# EAGLE board shrinking (EAGLE 7.5.0)
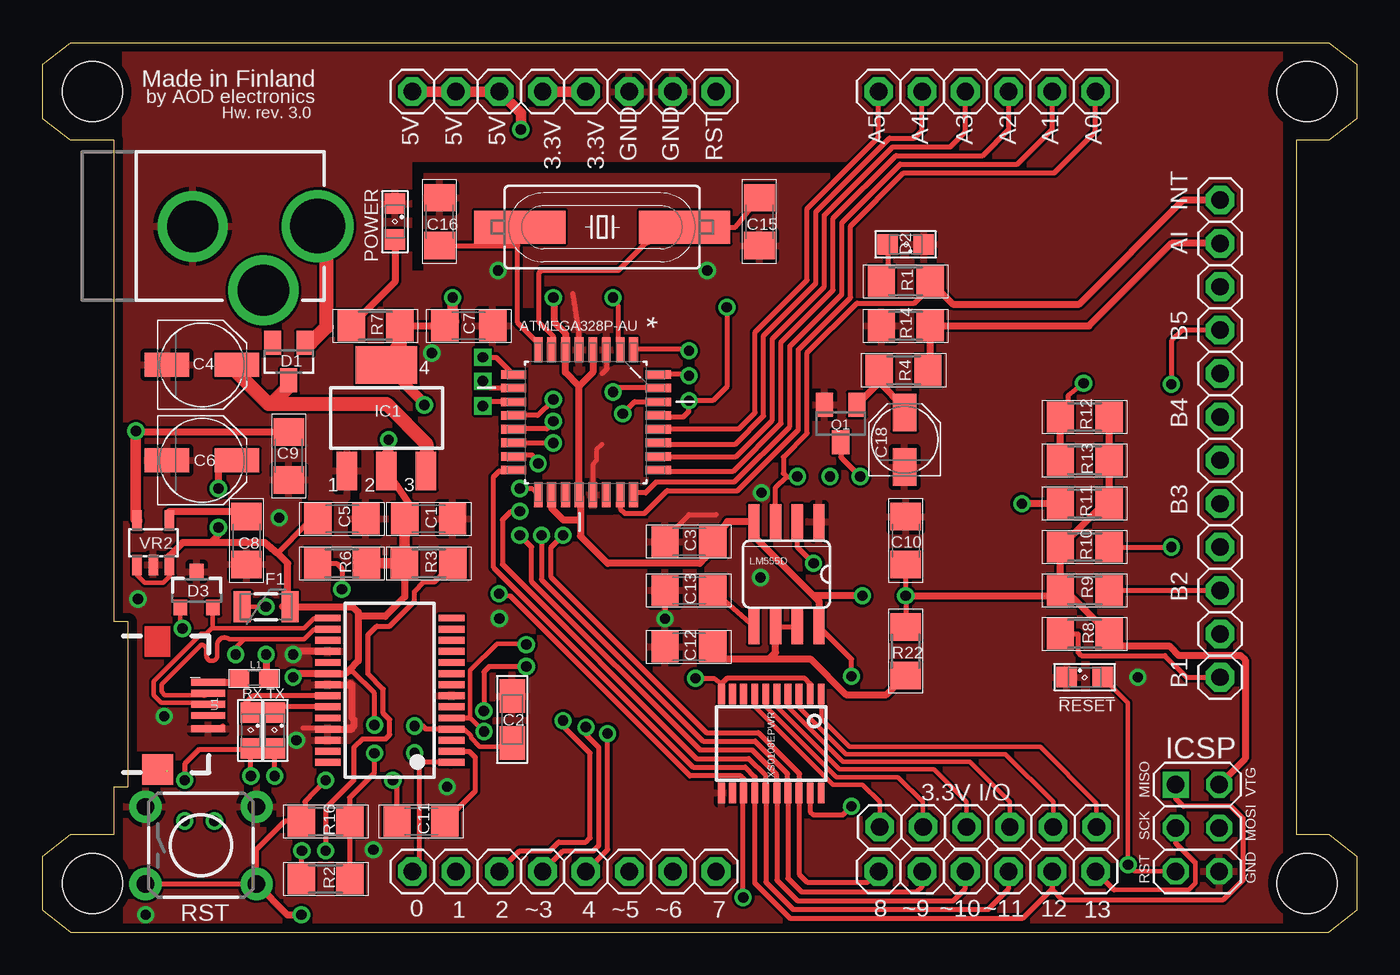
[diagram p0: board, top side]
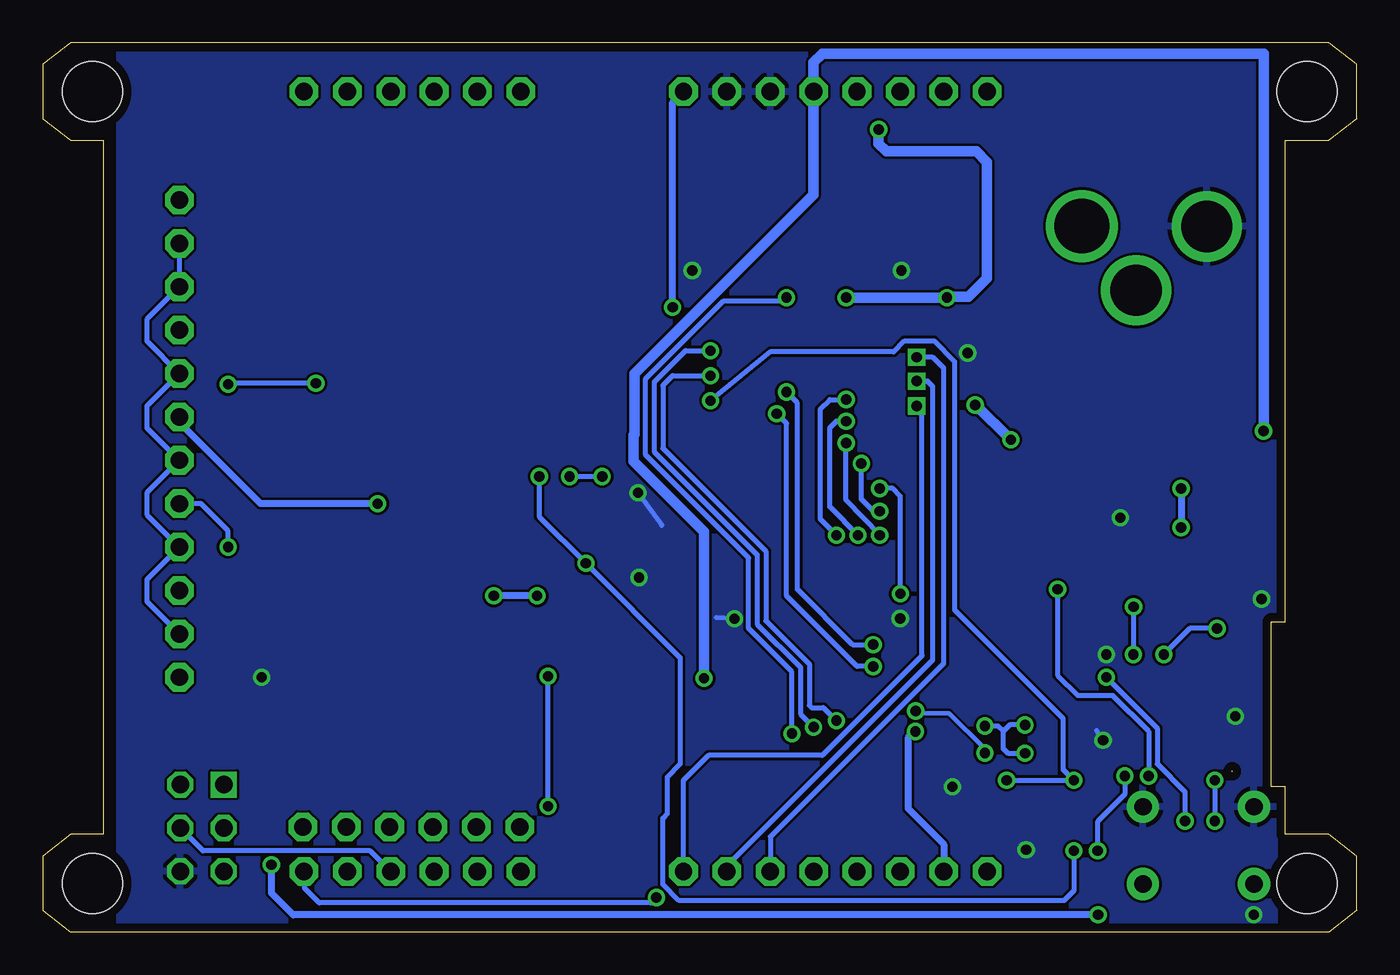
[diagram p1: board, bottom side, seen from below]

Size 76.96 x 52.07 mm. Coordinates in mm from the lower left corner, seen from the top.
Outline: 7.3,9.4 7.3,9.46
Outline: 1.65,0 75.31,0 76.96,1.27 76.96,4.45 75.31,5.71 73.41,5.71 73.41,46.35 75.31,46.35 76.96,47.62 76.96,50.8 75.31,52.07 1.65,52.07 0,50.8 0,47.62 1.65,46.35 4.19,46.35 4.19,18.16 5.02,18.16 5.02,8.51 4.19,8.51 4.19,5.71 1.65,5.71 0,4.45 0,1.27 1.65,0
Copper layers (1*16): Top 0.035mm / dielectric 1.5mm / Bottom 0.035mm
Design rules "default *": minimum track width 10mil, minimum drill 24mil, track to track 6mil, track to pad 6mil, pad to pad 6mil, via to via 6mil, smd to smd 6mil, copper to edge 20mil, drill to drill 8mil, minimum pad ring 10mil, minimum via ring 8mil, stop-mask expansion 4mil, vias tented up to drill 0mil, thermal gap 10mil
Holes 3.5 mm at 74.04,49.21 74.04,2.86 2.92,49.21 2.92,2.86

## Footprints (pad centres in the part's own frame; a part is rotated, then mirrored left to right if it is on the bottom)
1X06 = drill 1.016 pad 1.676 octagon: 1 -6.35,0; 2 -3.81,0; 3 -1.27,0; 4 1.27,0; 5 3.81,0; 6 6.35,0
1X12 = drill 1.016 pad 1.676 octagon: 1 -13.97,0; 2 -11.43,0; 3 -8.89,0; 4 -6.35,0; 5 -3.81,0; 6 -1.27,0; 7 1.27,0; 8 3.81,0; 9 6.35,0; 10 8.89,0; 11 11.43,0; 12 13.97,0
C1206 = smd 1.6 x 1.8: 1 -1.4,0; 2 1.4,0
A/3216-18R = smd 1.95 x 1.5: + 1.375,0; - -1.375,0
PANASONIC_C = smd 2.6 x 1.4: + 2.05,0; - -2.05,0
PANASONIC_B = smd 2.2 x 1.4: + 1.6,0; - -1.6,0
1X08 = drill 1.016 pad 1.676 octagon: 1 -8.89,0; 2 -6.35,0; 3 -3.81,0; 4 -1.27,0; 5 1.27,0; 6 3.81,0; 7 6.35,0; 8 8.89,0
SOT23 = smd 1 x 1.4: 1 -0.95,-1.1; 2 0.95,-1.1; 3 0,1.1
SML0805 = smd 1.2 x 1.2: A 1.05,0; C -1.05,0
SOT23-3 = smd 0.8 x 0.9: 1 -0.95,-1; 2 0.95,-1; 3 0,1.1
PTC-1206 = smd 1 x 1.8: 1 -1.4,0; 2 1.4,0
SOT223 = smd 1.219 x 2.235: 1 -2.311,-3.099; 2 0,-3.099; 3 2.311,-3.099 | smd 3.6 x 2.2: 4 0,3.099
SSOP28 = smd 0.4 x 1.5: 1 -4.225,-3.625; 2 -3.575,-3.625; 3 -2.925,-3.625; 4 -2.275,-3.625; 5 -1.625,-3.625; 6 -0.975,-3.625; 7 -0.325,-3.625; 8 0.325,-3.625; 9 0.975,-3.625; 10 1.625,-3.625; 11 2.275,-3.625; 12 2.925,-3.625; 13 3.575,-3.625; 14 4.225,-3.625; 15 4.225,3.625; 16 3.575,3.625; 17 2.925,3.625; 18 2.275,3.625; 19 1.625,3.625; 20 0.975,3.625; 21 0.325,3.625; 22 -0.325,3.625; 23 -0.975,3.625; 24 -1.625,3.625; 25 -2.275,3.625; 26 -2.925,3.625; 27 -3.575,3.625; 28 -4.225,3.625
SO08 = smd 0.66 x 2.032: 1 -1.905,-3.073; 2 -0.635,-3.073; 3 0.635,-3.073; 4 1.905,-3.073; 5 1.905,3.073; 6 0.635,3.073; 7 -0.635,3.073; 8 -1.905,3.073
2X03 = drill 1.016 square: 1 -2.54,-1.27 | drill 1.016 octagon: 2 -2.54,1.27; 3 0,-1.27; 4 0,1.27; 5 2.54,-1.27; 6 2.54,1.27
POWER_JACK_PTH_LOCK = drill 2.997 pad 4.115: GND 0.025,6.557; GNDBREAK 3.762,10.7 | drill 3.2 pad 4.115: PWR 0,13.878
0603 = smd 1.1 x 1: 1 -0.85,0; 2 0.85,0
PW-TSSOP-G20 = smd 0.4 x 1.2: 1 -2.925,-2.9; 2 -2.275,-2.9; 3 -1.625,-2.9; 4 -0.975,-2.9; 5 -0.325,-2.9; 6 0.325,-2.9; 7 0.975,-2.9; 8 1.625,-2.9; 9 2.275,-2.9; 10 2.925,-2.9; 11 2.925,2.9; 12 2.275,2.9; 13 1.625,2.9; 14 0.975,2.9; 15 0.325,2.9; 16 -0.325,2.9; 17 -0.975,2.9; 18 -1.625,2.9; 19 -2.275,2.9; 20 -2.925,2.9
QFP80P900X900X120-32N = smd 1.473 x 0.508: 1 -4.242,2.794; 2 -4.242,2.007; 3 -4.242,1.194; 4 -4.242,0.406; 5 -4.242,-0.406; 6 -4.242,-1.194; 7 -4.242,-2.007; 8 -4.242,-2.794; 17 4.242,-2.794; 18 4.242,-2.007; 19 4.242,-1.194; 20 4.242,-0.406; 21 4.242,0.406; 22 4.242,1.194; 23 4.242,2.007; 24 4.242,2.794 | smd 0.508 x 1.473: 9 -2.794,-4.242; 10 -2.007,-4.242; 11 -1.194,-4.242; 12 -0.406,-4.242; 13 0.406,-4.242; 14 1.194,-4.242; 15 2.007,-4.242; 16 2.794,-4.242; 25 2.794,4.242; 26 2.007,4.242; 27 1.194,4.242; 28 0.406,4.242; 29 -0.406,4.242; 30 -1.194,4.242; 31 -2.007,4.242; 32 -2.794,4.242
R1206 = smd 1.6 x 1.803: 1 -1.422,0; 2 1.422,0
TACTILE-PTH = drill 1.016 pad 1.88: 1 -3.251,2.261; 2 3.251,2.261; 3 -3.251,-2.261; 4 3.251,-2.261
USB-MICRO-SMD = smd 2 x 0.4: D+1 2.954,0; D-1 2.954,0.65; GND1 2.954,-1.427; ID1 2.954,-0.65; VBUS1 2.954,1.3 | smd 1.8 x 1.8: P$1 0,-3.81
SOT25 = smd 0.55 x 1.2: 1 -0.95,-1.3; 2 0,-1.3; 3 0.95,-1.3; 4 0.95,1.3; 5 -0.95,1.3
HC49UP = smd 5.334 x 1.93: 1 -4.826,0; 2 4.826,0

## Placement (x,y rotation side)
ANALOGINPUT  [1X06]  55.31,49.21 180 top
BUTTON  [1X12]  68.96,28.89 90 top
C1  0.1u  [C1206]  22.61,24.19 0 top
C2  10u  [A/3216-18R]  27.5,12.45 270 top
C3  0.1u  [C1206]  37.85,22.86 180 top
C4  47u  [PANASONIC_C]  9.33,33.21 0 top
C5  2.2u  [C1206]  17.53,24.19 0 top
C6  47u  [PANASONIC_C]  9.33,27.62 0 top
C7  1u  [C1206]  24.96,35.5 0 top
C8  10n  [C1206]  11.94,22.92 270 top
C9  2.2u  [C1206]  14.41,27.88 270 top
C10  0.1u  [C1206]  50.55,22.92 270 top
C11  0.1u  [C1206]  22.16,6.48 0 top
C12  100u  [C1206]  37.85,16.7 180 top
C13  0.1u  [C1206]  37.85,20 0 top
C15  22p  [C1206]  41.97,41.59 90 top
C16  22p  [C1206]  23.24,41.59 90 top
C18  1u  [PANASONIC_B]  50.48,28.83 90 top
D0-D7  [1X08]  30.54,3.56 0 top
D1  PMEG  [SOT23]  14.41,33.4 180 top
D2  [SML0805]  50.55,40.26 180 top
D3  TVS  [SOT23-3]  9.02,20 0 top
D8-D13_3.3V  [1X06]  55.37,6.16 180 top
D8-D13_5V  [1X06]  55.31,3.56 0 top
F1  PTC  [PTC-1206]  13.08,19.05 0 top
IC1  NCP1117LP  [SOT223]  20.13,30.1 0 top
IC2  FT232RL  [SSOP28]  20.32,14.16 90 top
IC3  LM555D  [SO08]  43.56,20.95 180 top
ICSP  [2X03]  67.63,6.1 270 top
J2  POWER_JACKPTH_LOCK  [POWER_JACK_PTH_LOCK]  2.22,41.34 270 top
L1  74279266  [0603]  12.38,14.86 0 top
LVL_SHIFTER  TXS0108EPWR  [PW-TSSOP-G20]  42.67,11.05 180 top
MCU  ATMEGA328P-AU  [QFP80P900X900X120-32N]  31.81,29.84 270 top
POWER  [SML0805]  20.64,41.59 270 top
PWR  [1X08]  30.54,49.21 0 top
Q1  BC847CSMD  [SOT23]  46.74,29.78 180 top
R1  1k  [R1206]  50.55,38.1 0 top
R2  250  [R1206]  16.57,3.11 0 top
R3  10k  [R1206]  22.61,21.59 180 top
R4  10k  [R1206]  50.42,32.89 180 top
R6  250  [R1206]  17.53,21.59 0 top
R7  250  [R1206]  19.49,35.5 0 top
R8  23  [R1206]  61.02,17.46 0 top
R9  1k  [R1206]  61.02,20 180 top
R10  2k  [R1206]  61.02,22.54 180 top
R11  3k  [R1206]  61.02,25.08 0 top
R12  10k  [R1206]  61.02,30.16 0 top
R13  10k  [R1206]  61.02,27.62 0 top
R14  1k  [R1206]  50.55,35.5 0 top
R16  10k  [R1206]  16.57,6.48 0 top
R22  250  [R1206]  50.55,16.45 90 top
RESET  [SML0805]  61.02,14.92 0 top
RX  [SML0805]  12.19,11.81 270 top
S1  [TACTILE-PTH]  9.27,5.08 0 top
TX  [SML0805]  13.59,11.81 270 top
U1  [USB-MICRO-SMD]  6.73,13.34 0 top
VR2  VR2  [SOT25]  6.48,22.8 0 top
XTAL  [HC49UP]  32.77,41.27 0 top

## Library data of the parts
ANALOGINPUT BUTTON D0-D7 D8-D13_3.3V D8-D13_5V ICSP PWR = pinhead
C1-C3 C5 C7-C13 C15 C16 C18 = rcl
C4 C6 R1-R4 R6-R14 R16 R22 = resistor
D1 = diode
D2 POWER RESET RX TX = led
D3 = SparkFun-DiscreteSemi
F1 = SparkFun-PowerIC; PROD_ID: RES-11150
IC1 = linear
IC2 = ftdichip; MPN: FT232RL; OC_FARNELL: 1146032; OC_NEWARK: 91K9918
IC3 = adafruit
J2 = SparkFun-Connectors; PROD_ID: CONN-08197; SF_ID: PRT-00119
L1 = SparkFun-Passives
LVL_SHIFTER = veter
MCU = Atmel-ATMEGA328P-AU; DESCRIPTION: 8-bit Microcontroller with In-System Programmable Flash; MPN: ATMEGA328P-AU; OC_FARNELL: 1715486; OC_NEWARK: 14R4631; PACKAGE: TQFP-32; SUPPLIER: Atmel
Q1 = transistor-npn
S1 = SparkFun-Retired
U1 = MicroUSB
VR2 = LP2985
XTAL = SparkFun-FreqCtrl

## Nets
3.3V: C9.1 LVL_SHIFTER.2 LVL_SHIFTER.10 PWR.4 PWR.5 VR2.5
A0: ANALOGINPUT.1 MCU.23
A1: D8-D13_5V.1 LVL_SHIFTER.18 MCU.12
A2: D8-D13_5V.2 LVL_SHIFTER.17 MCU.13
A3: D8-D13_5V.3 LVL_SHIFTER.16 MCU.14
A4: D8-D13_5V.4 ICSP.4 LVL_SHIFTER.15 MCU.15
A5: D8-D13_5V.5 ICSP.1 LVL_SHIFTER.14 MCU.16
A6: D8-D13_5V.6 ICSP.3 LVL_SHIFTER.13 MCU.17
AIN: BUTTON.2 BUTTON.4 BUTTON.6 BUTTON.8 BUTTON.10 BUTTON.11 R4.1 R14.2
BYPASS: C8.1 VR2.4
DTR: C11.2 IC2.2
GND: C1.2 C2.- C3.2 C4.- C5.2 C6.- C7.2 C8.2 C9.2 C10.1 C12.2 C13.1 C15.1 C16.2 C18.- D2.C D3.3 IC1.1 IC2.7 IC2.18 IC2.21 IC2.25 IC2.26 IC3.1 ICSP.6 J2.GND LVL_SHIFTER.11 MCU.3 MCU.5 MCU.21 POWER.C PWR.6 PWR.7 Q1.2 R14.1 RESET.C S1.1 S1.2 U1.GND1 VR2.2
INT: BUTTON.12 IC3.3 R1.2
N$1: D8-D13_3.3V.1 LVL_SHIFTER.1
N$2: F1.1 L1.2
N$3: D2.A R1.1
N$4: D8-D13_3.3V.2 LVL_SHIFTER.3
N$5: C13.2 IC3.5
N$6: C12.1 IC3.6 IC3.7 R22.1
N$7: C18.+ Q1.1 R4.2
N$8: POWER.A R7.1
N$9: D8-D13_3.3V.3 LVL_SHIFTER.4
N$10: D8-D13_3.3V.4 LVL_SHIFTER.5
N$11: LVL_SHIFTER.20
N$13: ANALOGINPUT.2 MCU.24
N$15: ANALOGINPUT.3 MCU.25
N$16: ANALOGINPUT.4 MCU.26
N$17: ANALOGINPUT.5 MCU.27
N$18: ANALOGINPUT.6 MCU.28
N$19: D0-D7.3 MCU.32
N$20: D0-D7.4 MCU.1
N$21: D0-D7.5 MCU.2
N$22: D0-D7.6 MCU.9
N$23: D0-D7.7 MCU.10
N$24: D0-D7.8 MCU.11
N$25: C15.2 MCU.7 XTAL.2
N$26: C16.1 MCU.8 XTAL.1
N$33: C4.+ D1.3 IC1.3
N$37: R2.1 TX.A
N$38: IC2.23 TX.C
N$39: R6.1 RX.A
N$40: IC2.22 RX.C
N$41: D1.1 J2.PWR
N$42: D8-D13_3.3V.5 LVL_SHIFTER.6
N$43: D8-D13_3.3V.6 LVL_SHIFTER.7
N$44: L1.1 U1.VBUS1
RST: C11.1 ICSP.5 MCU.29 PWR.8 R16.1 RESET.A S1.3 S1.4
RXD_USB: D0-D7.2 IC2.5 MCU.31
S1: BUTTON.1 R8.1
S2: BUTTON.3 R9.1
S3: BUTTON.5 R10.1
S4: BUTTON.7 R11.1
S5: BUTTON.9 R12.1 R13.1
TRIGGER: IC3.2 Q1.3 R3.1
TXD_USB: D0-D7.1 IC2.1 MCU.30
USB_D_N [differential]: D3.1 IC2.16 U1.D-1
USB_D_P [differential]: D3.2 IC2.15 U1.D+1
VCC: C1.1 C2.+ C3.1 C5.1 C6.+ C7.1 C10.2 F1.2 IC1.2 IC1.4 IC2.4 IC2.20 IC3.4 IC3.8 ICSP.2 LVL_SHIFTER.19 MCU.4 MCU.6 MCU.18 MCU.20 PWR.1 PWR.2 PWR.3 R2.2 R3.2 R6.2 R7.2 R8.2 R9.2 R10.2 R11.2 R12.2 R13.2 R16.2 R22.2 VR2.1 VR2.3

## Tracks (layer width: path | path; a pad name or v marks a point on that pad's centre or on a via)
3.3V  (via drill 0.6)
  Top 0.305: LVL_SHIFTER.2 44.95,14.55 44.64,14.86 40.07,14.86 39.75,14.54 | 39.75,14.54 LVL_SHIFTER.10 | v38.23,14.86 39.31,14.86 39.75,14.54
  Top 0.406: C9.1 5.52,29.28 v5.46,29.34
  Top 0.61: PWR.4 PWR.5 | v5.46,29.34 5.46,24.16 VR2.5
  Bottom 0.61: v5.46,29.34 5.46,51.44 31.3,51.44 31.81,50.93 PWR.5 31.81,43.18 42.29,32.7 42.29,29.15 42.35,29.08 42.35,27.56 38.23,23.43 v38.23,14.86
A0
  Top 0.305: MCU.23 33.82,24.79 34.1,24.51 35.24,24.51 36.58,25.84 40.7,25.84 44.26,29.4 44.26,34.1 47.31,37.15 47.31,41.34 50.42,44.45 59.24,44.45 61.66,46.86 ANALOGINPUT.1
A1  (via drill 0.6)
  Top 0.305: MCU.12 28.98,30.25 v29.91,31.18 | D8-D13_5V.1 48.32,2.92 44.77,2.92 44.3,3.39 LVL_SHIFTER.18 44.32,8.18 44.32,9.27 41.91,11.68 38.86,11.68 29.78,20.77 29.78,22.54 v30.48,23.24
  Bottom 0.305: v30.48,23.24 31.43,24.19 31.43,30.61 30.86,31.18 v29.91,31.18
A2  (via drill 0.6, 0.6 pad 0.25)
  Top 0.305: 27.66,29.53 MCU.13 27.6,29.46 29.53,29.46 29.91,29.84 v29.91,29.91 | D8-D13_5V.2 51.5,2.67 51.18,2.35 44.45,2.35 43.65,3.15 LVL_SHIFTER.17 43.62,8.17 43.62,9.27 41.72,11.18 38.67,11.18 29.21,20.64 v29.21,23.24
  Bottom 0.305: v29.21,23.24 30.86,24.89 30.86,29.53 30.48,29.91 v29.91,29.91
A3  (via drill 0.6)
  Top 0.305: 27.65,28.57 MCU.14 29.9,28.65 v29.91,28.64 | D8-D13_5V.3 54.04,2.54 53.34,1.84 44.2,1.84 43,3.04 LVL_SHIFTER.16 42.99,8.16 42.99,9.21 41.53,10.67 38.48,10.67 28.64,20.51 28.64,22.54 v27.94,23.24
  Bottom 0.305: v27.94,23.24 29.91,25.27 v29.91,28.64
A4  (via drill 0.6)
  Top 0.305: MCU.15 27.67,27.94 28.64,27.94 29.02,27.56 v29.02,27.43 | LVL_SHIFTER.15 | LVL_SHIFTER.15 42.35,8.95 | LVL_SHIFTER.15 42.35,2.93 43.94,1.33 55.37,1.33 56.58,2.54 D8-D13_5V.4 | 42.35,8.95 | 42.35,8.95 42.35,9.15 41.34,10.16 38.29,10.16 26.92,21.53 26.92,24.13 27.43,24.64 v27.94,24.64
  Bottom 0.254: 68.9,6.03 ICSP.4
  Bottom 0.305: v27.94,24.64 28.32,24.64 29.02,25.34 v29.02,27.43 | D8-D13_5V.4 57.78,4.76 67.56,4.76 ICSP.4
A5
  Top 0.305: MCU.16 27.51,26.99 26.73,26.99 26.42,26.67 26.42,21.34 38.1,9.65 41.15,9.65 41.72,9.08 41.72,8.17 LVL_SHIFTER.14 41.7,2.88 43.75,0.83 57.4,0.83 59.12,2.54 D8-D13_5V.5 59.12,2.48 59.69,1.91 69.15,1.91 70.29,3.05 70.29,6.67 69.6,7.37 66.8,7.37 66.36,7.81 ICSP.1
A6  (via drill 0.6)
  Top 0.254: 62.74,2.48 67.12,2.48 67.5,2.86 67.5,4.06
  Top 0.305: 29.02,26.04 MCU.17 28.65,25.97 v27.94,25.97 | v26.73,19.81 27.37,19.68 37.91,9.14 40.89,9.14 41.05,8.99 LVL_SHIFTER.13 | 41.08,8.19 LVL_SHIFTER.13 | v41.02,2.03 41.02,8.12 LVL_SHIFTER.13 | ICSP.3 66.36,5.21 67.5,4.06 | 62.74,2.48 D8-D13_5V.6
  Bottom 0.305: v26.73,19.81 26.73,25.53 27.18,25.97 v27.94,25.97 | v41.02,2.03 41.34,1.71 60.77,1.71 61.63,2.57 61.63,3.52 D8-D13_5V.6
AIN
  Top 0.406: BUTTON.11 66.1,40.32 61.28,35.5 R14.2 51.97,33.02 R4.1
  Bottom 0.305: BUTTON.11 BUTTON.10 70.87,35.88 70.87,34.61 BUTTON.8 70.87,30.8 70.87,29.53 BUTTON.6 70.87,25.72 70.87,24.45 BUTTON.4 70.87,20.64 70.87,19.37 BUTTON.2
BYPASS
  Top 0.305: 12.13,24.77 C8.1
  Top 0.406: 7.43,24.13 VR2.4 7.43,24.64 11.62,24.64 C8.1
CUT
  cutout Top: 22.29,44.45 43.24,44.45 43.24,45.09 22.29,45.09
  cutout Top: 22.29,45.09 21.65,45.09 21.65,38.73 22.29,38.73
DTR
  Top 0.305: IC2.2 24.97,10.59 25.34,10.22 25.34,8.25 C11.2
GND  (via drill 0.6, 0.61)
  Top 0.254: MCU.21 32.22,27.39 32.45,27.62 32.45,28.26 32.77,28.57 | 32.77,32.7 33.08,33.02
  Top 0.305: 35.81,23.5 C3.2 | v36.45,18.35 36.45,18.55 C13.1 | MCU.5 31.41,35.15 31.05,37.4 | 35.94,22.86 36.26,23.18 36.58,23.18 37.85,24.45 39.43,24.45 | U1.GND1 10.51,12.04 10.54,12.06 | 17.84,11.87 17.08,11.87 17.02,11.94 15.24,11.94 | 15.24,11.37 v14.86,11.24 15.11,11.3 | MCU.3 33.01,32.94 32.77,32.7
  Top 0.406: IC2.18 14.85,16.44 v14.67,16.26 | IC2.21 17.97,14.49 17.97,14.48 | IC2.25 18.1,11.89 18.1,11.94 | 18.1,11.94 18.1,12 | IC2.21 18.03,14.49 18.03,14.54 | IC2.21 18.1,14.49 18.1,12.57 18.22,12.45 18.22,12.06 18.1,11.94 | 18.1,11.94 17.91,11.94 17.84,11.87
  Bottom 0.305: v36.45,18.35 37.53,18.41 | v42.1,25.72 40.7,23.81 | v14.86,11.24 15.24,11.81
  other vias: 5.59,19.49 38.93,38.73 19.37,4.83 13.84,24.26 7.11,12.64 6.03,1.02 42.04,20.76 64.14,14.92 23.69,8.51 26.73,18.35 22.8,33.91 26.67,38.73
  pour Bottom: 4.83,0 72.45,0.32 72.45,52.07 4.83,52.07
  pour Top: 4.89,0 72.45,0.32 72.45,52.07 4.83,52.07
INT  (via drill 0.6)
  Top 0.305: IC3.3 42.93,26.04 43.56,26.67 | 43.56,26.67 v44.2,26.67 | R1.2 51.69,37.76 51.69,37.47 51.05,36.83 47.69,36.83 44.77,33.91 44.77,29.21 43.37,27.81 43.37,26.86 43.56,26.67
  Top 0.406: BUTTON.12 66.8,42.86 60.71,36.77 53.3,36.77 R1.2
  Bottom 0.305: v44.2,26.67 v46.1,26.67
N$1
  Top 0.254: LVL_SHIFTER.1 45.6,12.51 47.24,10.86 58.42,10.86 61.72,7.56 D8-D13_3.3V.1
  Top 0.305: LVL_SHIFTER.1
N$2  (via drill 0.6, 0.61)
  Top 0.254: F1.1 v13.08,19.05
  Top 0.406: v13.08,16.26 13.08,14.82 L1.2
  Bottom 0.305: v13.08,19.05 v13.08,16.26
N$3
  Top 0.305: 49.34,38.25 R1.1 49.56,38.47 49.5,38.53 D2.A
N$4
  Top 0.254: 44.32,13.92 44.32,13.14 47.05,10.41 56.39,10.41 59.18,7.62 D8-D13_3.3V.2
  Top 0.305: 44.32,13.92 LVL_SHIFTER.3
N$5
  Top 0.305: C13.2 41.66,17.91 IC3.5
N$6
  Top 0.305: IC3.6 IC3.7
  Top 0.406: C12.1 39.88,16 42.55,16 | 42.55,16 42.93,16.38 IC3.6 | R22.1 49.57,14.05 49.43,13.91 47.05,13.91 44.96,16 42.55,16
N$7
  Top 0.406: 47.69,31.34 Q1.1 49,32.19 | R4.2 49,32.19 | C18.+ 50.48,30.71 49,32.19
N$8
  Top 0.305: R7.1 20.7,38.12
  Top 0.406: POWER.A 20.64,38.06 R7.1
N$9
  Top 0.254: LVL_SHIFTER.4 43.65,13.19 46.86,9.97 54.29,9.97 56.64,7.62 D8-D13_3.3V.3
  Top 0.305: 43.62,13.93 LVL_SHIFTER.4
N$10
  Top 0.254: LVL_SHIFTER.5 43,13.2 46.67,9.53 52.2,9.53 54.1,7.62 D8-D13_3.3V.4
  Top 0.305: 42.99,13.94 LVL_SHIFTER.5
N$13
  Top 0.305: MCU.24 34.72,25.72 35.31,25.72 35.94,26.35 40.51,26.35 43.75,29.59 43.75,34.29 46.8,37.34 46.8,41.53 50.23,44.96 57.09,44.96 59.12,46.99 ANALOGINPUT.2
N$15
  Top 0.305: MCU.25 36.12,26.99 40.45,26.99 43.24,29.78 43.24,34.54 46.29,37.59 46.29,41.78 49.97,45.47 55.05,45.47 56.58,46.99 ANALOGINPUT.3
N$16
  Top 0.305: MCU.26 40.6,27.84 42.74,29.97 42.74,34.73 45.78,37.78 45.78,41.97 49.78,45.97 53.15,45.97 54.04,46.86 ANALOGINPUT.4
N$17
  Top 0.305: MCU.27 36.13,28.57 40.58,28.57 42.23,30.23 42.23,34.92 45.28,37.97 45.28,42.16 49.59,46.48 51.05,46.48 51.5,46.93 ANALOGINPUT.5
N$18
  Top 0.305: MCU.28 36.14,29.53 36.21,29.46 40.77,29.46 41.72,30.42 41.72,35.12 44.77,38.16 44.77,42.35 48.96,46.55 ANALOGINPUT.6
N$19  (via drill 0.6)
  Top 0.305: MCU.32 36.12,32.7 37.72,32.7 v37.85,32.58 | D0-D7.3 27.94,4.76 29.72,4.76 30.23,5.27 31.81,5.27 32.07,5.52 32.07,10.48 30.48,12.06 v30.48,12.38
  Bottom 0.305: v37.85,32.58 40.07,32.58 40.64,32 40.64,28.32 34.61,22.29 34.61,18.22 32.07,15.68 32.07,13.27 31.94,13.14 31.24,13.14 v30.48,12.38
N$20  (via drill 0.6)
  Top 0.305: MCU.1 34.67,34.15 37.73,34.15 v37.85,34.04 | D0-D7.4 30.48,4.76 32.26,4.76 32.58,5.08 32.58,10.79 31.81,11.56 v31.81,12
  Bottom 0.305: v37.85,34.04 39.31,34.04 41.15,32.19 41.15,28.13 35.12,22.1 35.12,18.03 32.58,15.49 32.58,12.76 v31.81,12
N$21  (via drill 0.6)
  Top 0.305: MCU.2 33.72,34.19 33.72,36.64 v33.4,37.15 | D0-D7.5 33.08,4.83 v33.08,11.62
  Bottom 0.305: v33.08,11.62 33.08,15.24 35.62,17.78 35.62,21.91 41.66,27.94 41.66,32.38 37.08,36.96 33.15,36.96 v33.4,37.15
N$22  (via drill 0.6)
  Top 0.305: v25.78,33.66 26.56,33.66 MCU.9
  Bottom 0.305: v25.78,33.66 24.83,33.66 24.19,33.02 24.19,15.75 34.35,5.59 D0-D7.6
N$23  (via drill 0.6)
  Top 0.305: 27.47,31.75 MCU.10 27.55,31.88 26.16,31.88 v25.78,32.26
  Bottom 0.305: v25.78,32.26 25.15,32.26 24.83,31.94 24.83,15.94 36.89,3.87 D0-D7.7
N$24  (via drill 0.6)
  Top 0.305: 27.5,31.11 MCU.11 26.02,31.04 v25.78,30.8
  Bottom 0.305: v25.78,30.8 25.46,30.48 25.46,16.19 31.3,10.35 37.97,10.35 39.43,8.89 D0-D7.8
N$25
  Top 0.305: MCU.7 29.91,34.19 29.91,34.86 29.08,35.69 29.08,38.61 29.21,38.73 33.72,38.73 35.31,40.32 XTAL.2 40.57,41.27 C15.2
N$26
  Top 0.305: C16.1 27.81,40.19 | 27.81,40.19 XTAL.1 | MCU.8 29.02,34.48 27.81,35.69 27.81,40.19
N$30
  cutout Top: 31.81,24.77 32.45,24.77 32.45,24.45 31.81,24.45
N$32
  cutout Top: 43.24,44.45 46.55,44.45 47.12,45.09 43.24,45.09
N$33
  Top 0.61: C4.+ 11.38,32.75
  Top 0.813: 13.4,30.92 13.21,30.92 11.38,32.75 | 13.4,30.92 20.13,30.92 22.48,28.57 22.48,27.04 IC1.3 | D1.3 14.41,31.94 13.4,30.92
N$35
  cutout Top: 28,35.56 28.64,35.56 28.64,36.51 28,36.51
N$36
  cutout Top: 32.45,24.45 33.4,24.45 33.4,24.77 32.45,24.77
N$37  (via drill 0.6)
  Top 0.305: R2.1 15.18,3.11 v15.18,4.76 | v13.59,9.14 TX.A
  Top 0.406: TX.A 13.4,10.76
  Bottom 0.305: v15.18,4.76 15.15,4.45 15.15,6.5 13.59,8.06 v13.59,9.14
N$38
  Top 0.305: IC2.23 13.91,13.19 TX.C
N$39  (via drill 0.6)
  Top 0.305: v8.32,8.89 8.32,9.84 9.17,10.7 12.13,10.7 RX.A v12.19,9.14 | R6.1 17.21,21.59 17.53,21.27 v17.53,20.07
  Bottom 0.305: v8.32,8.89 v8.32,6.5 | v17.53,20.07 17.53,15.05 16.32,13.84 14.29,13.84 12.19,11.75 v12.19,9.14
N$40
  Top 0.305: 11.91,12.8 RX.C 11.81,13.34 12.31,13.84 IC2.22
N$41
  Top 0.813: J2.PWR 16.64,40.8 16.64,35.43 15.71,34.5 D1.1
N$42
  Top 0.254: LVL_SHIFTER.6 42.35,13.21 46.48,9.08 50.1,9.08 51.56,7.62 D8-D13_3.3V.5
  Top 0.305: LVL_SHIFTER.6
N$43
  Top 0.254: 41.72,13.93 41.72,13.21 46.29,8.64 48.01,8.64 49.02,7.62 D8-D13_3.3V.6
  Top 0.305: 41.72,13.93 LVL_SHIFTER.7
N$44
  Top 0.406: U1.VBUS1 11.18,14.63 L1.1
RST  (via drill 0.6)
  Top 0.254: RESET.A 63.56,13.43 v63.56,3.94 63.94,3.56 ICSP.5
  Top 0.305: S1.3 S1.4 12.51,2.83 12.51,4.83 14.16,6.48 R16.1 | MCU.29 36.14,30.16 37.53,30.16 37.85,30.48 v37.85,31.11 39.24,31.11 40.07,31.94 v40.07,36.58 | v16.57,8.89 15.37,7.62 15.37,6.69 R16.1 | 15.15,6.06 15.11,6.1 15.15,6.13 R16.1 | C11.1 20.76,8.57 v20.51,8.89
  Top 0.406: S1.4 14.33,1.02 v15.15,1.02
  Bottom 0.305: v37.85,31.11 34.35,33.97 27.11,33.97 26.48,34.61 24.77,34.61 23.56,33.4 23.56,18.86 17.21,12.51 17.21,9.53 v16.57,8.89 20.38,8.89 20.45,8.83 v20.51,8.89
  Bottom 0.406: v15.15,1.02 62.29,1.02 63.56,2.29 v63.56,3.94 | v40.07,36.58 40.07,48.58 PWR.8
RXD_USB  (via drill 0.6, 0.61)
  Top 0.254: v25.84,11.75 v25.83,11.75 25.05,12.54 25.05,15.33 26.61,16.89 28.26,16.89 v28.32,16.83
  Top 0.305: IC2.5 25.05,12.54 | MCU.31 35.95,31.75 35.83,31.88 33.66,31.88 v33.4,31.62
  Bottom 0.305: v33.4,31.62 32.77,30.99 32.77,20.07 29.53,16.83 v28.32,16.83
  Bottom 0.406: v25.84,11.75 26.29,11.37 26.29,7.24 24.19,5.14 D0-D7.2
S1
  Top 0.305: BUTTON.1 66.99,14.92 65.72,16.19 60.83,16.19 60.64,16.38 60.64,17.46 R8.1
S2
  Top 0.305: R9.1 BUTTON.3
S3  (via drill 0.6)
  Top 0.305: R10.1 v66.1,22.54
  Bottom 0.305: v66.1,22.54 66.1,23.5 67.69,25.08 BUTTON.5
S4  (via drill 0.6)
  Top 0.305: 59.28,25.4 R11.1
  Top 0.406: R11.1 v57.34,25.08
  Bottom 0.406: v57.34,25.08 64.2,25.08 68.96,29.84 BUTTON.7
S5  (via drill 0.6)
  Top 0.305: R12.1 60.07,30.16 60.07,31.43 v60.96,32.13 | BUTTON.9 66.74,35.24 66.1,34.61 v66.1,32.07
  Top 0.406: R13.1 R12.1
  Bottom 0.305: v60.96,32.13 66.04,32.13 v66.1,32.07
TRIGGER  (via drill 0.6)
  Top 0.305: v45.15,21.59 44.2,22.54 IC3.2 | R3.1 23.71,20.79 | R3.1 24.03,21.11 | v16.57,4.76 16.57,7.24 18.22,8.89 18.22,10.79 18.73,11.3 20.07,11.3 20.32,11.56 20.32,12.45 19.94,12.83 19.94,14.22 19.05,15.11 19.05,17.4 19.56,17.91 20.32,17.91 21.78,19.37 21.78,19.94 22.35,20.51 22.95,20.51 R3.1 | Q1.3 46.74,27.81 v47.88,26.67
  Bottom 0.305: v16.57,4.76 16.57,2.41 17.14,1.84 39.69,1.84 40.64,2.79 40.64,6.67 40.39,6.92 40.39,9.08 39.62,9.84 39.62,16.07 v45.15,21.59 47.88,24.32 v47.88,26.67
TXD_USB  (via drill 0.6, 0.61)
  Top 0.305: 23.88,9.87 IC2.1 23.91,9.97 22.04,9.97 | 35.98,31.11 MCU.30 36.04,31.05 34.67,31.05 v33.97,30.35 | v21.78,10.48 21.78,10.22 22.04,9.97 | v28.32,15.56 26.16,15.56 25.84,15.24 v25.84,12.95 | 22.04,9.97 22.04,3.94 D0-D7.1
  Bottom 0.254: v21.78,10.48 21.78,10.73 23.88,12.83 25.78,12.83 v25.84,12.95
  Bottom 0.305: v28.32,15.56 29.27,15.56 33.4,19.68 33.4,29.78 v33.97,30.35
USB_D_N  (via drill 0.61)
  Top 0.254: IC2.16 15.9,17.73 15.31,17.14 11.81,17.14 | U1.D-1 arc-90 9.33,13.88 7.14,13.88 6.96,14.06 6.96,14.52 9.27,16.83 arc-90 9.59,16.51 9.59,16.19 arc180 10.22,16.19 10.22,16.83 arc-131 10.92,17.14 11.81,17.14 | D3.1 8.07,17.84 v8.19,17.78 | v11.3,16.26 11.3,16.64 11.81,17.14
  Bottom 0.305: v8.19,17.78 9.78,17.78 v11.3,16.26
USB_D_P
  Top 0.254: IC2.15 15.9,18.39 15.3,17.78 9.91,17.78 | U1.D+1 9.34,13.42 6.95,13.42 6.5,13.88 6.5,14.7 6.51,14.7 9.27,17.46 9.59,17.46 9.91,17.78 | D3.2 9.97,17.84 9.91,17.78
VCC  (via drill 0.6)
  Top 0.254: 14.35,19.68 14.35,19.18 F1.2 | IC2.4 24.69,11.89 25.08,11.49 25.08,11.37 25.59,10.86 27.28,10.86 C2.+ | VR2.1 5.53,20.89 5.97,20.45 7.05,20.45 7.43,20.83 VR2.3 | C7.1 23.55,36.13 24,36.58
  Top 0.305: 62.14,25.08 R11.2 | C3.1 38.93,22.67 | 31.5,25.51 MCU.20 | 41.66,23.18 IC3.4 | v19.43,12.13 19.43,13.97 18.16,15.24 17.97,15.24 17.91,15.3 | 59.28,19.68 R9.2 59.91,20 | IC2.4 22.47,11.89 22.29,12.06 v21.78,12.06 | 30.61,34.1 MCU.6 30.61,34.07 | 45.47,17.02 IC3.8 47.37,15.98 v47.37,14.99 | 29.97,37.08 v29.91,37.15 | 14.88,15.14 v14.67,14.92 | MCU.18 29.81,24.8 | R3.2 21.34,21.59 | R8.2 63.14,16.76 | v19.43,10.48 19.43,9.34 17.97,7.87 17.97,6.06 R16.2 R2.2 | 13.75,22.19 15.43,23.87 16.45,23.87 C5.1 15.75,24.57 | LVL_SHIFTER.19 44.95,7.06 45.15,6.86 46.86,6.86 v47.37,7.37 | 18.54,18.48 18.48,18.54 | 51.18,18.5 R22.2 v50.55,19.68 C10.2
  Top 0.406: R8.2 59.91,20 | R9.2 R10.2 62.14,25.08 | R12.2 R13.2 R11.2 | 31.5,25.51 31.5,24.13 | 31.5,24.13 31.5,23.18 33.08,21.59 38.48,21.59 38.8,21.91 38.8,22.73 C3.1 40.1,24.03 IC3.4 | 45.15,19.68 45.47,19.37 IC3.8 | 45.15,19.68 41.66,23.18 | v50.55,19.68 59.28,19.68 | 14.03,19.05 F1.2 18.16,19.05 18.48,18.73 18.48,18.54 18.48,15.88 17.91,15.3 17.74,15.14 IC2.20 14.88,15.14 | 30.61,34.1 30.61,35.05 29.97,35.69 29.97,37.08 | MCU.20 31.41,31.97 | 31.41,31.97 30.61,32.77 30.61,34.07 | MCU.4 32.22,32.78 31.41,31.97 | 29.81,24.8 30.48,24.13 31.5,24.13 | 7.43,21.78 7.43,21.25 VR2.3 7.43,22.04 8.19,22.8 9.84,22.8 | 63.14,16.76 65.98,16.76 66.55,16.19 70.17,16.19 70.42,15.94 70.42,10.16 ICSP.2 | 14.35,19.68 14.35,21.59 13.75,22.19 13.02,22.8 9.84,22.8 | 18.54,18.48 20.07,18.48 21.21,19.62 21.21,21.46 21.34,21.59 | v48.01,19.68 45.15,19.68 | 21.65,24.64 21.65,24.78 IC1.2 | R7.2 24,35.5 24,35.24 | v10.29,25.97 10.29,27.43 10.48,27.62 C6.+ | v10.29,23.69 10.29,23.24 9.84,22.8
  Top 0.61: v24,37.15 24,36.58 24,35.75 24,35.24 | PWR.1 PWR.2 PWR.3 28,47.94 v28,46.99 | 20.89,21.61 R3.2 | R3.2 21.18,24.17 C1.1 21.65,24.64 | R6.2 R3.2 | IC1.2 v20.26,28.83 | v22.35,30.86 22.35,30.98 IC1.4
  Top 0.813: 23.75,35.5 24,35.75 | IC1.4 20.92,34.43 R7.2
  Bottom 0.305: 20.7,11.75 21.02,12.06 v21.78,12.06 | 20.7,11.75 20.32,12.13 v19.43,12.13 | 20.7,11.75 20.7,10.73 20.45,10.48 v19.43,10.48 | v47.37,7.37 v47.37,14.99 | v14.67,14.92 11.68,11.94 11.68,9.84 10.06,8.22 v10.06,6.5
  Bottom 0.406: v48.01,19.68 v50.55,19.68 | v10.29,25.97 v10.29,23.69
  Bottom 0.61: v29.91,37.15 v24,37.15 23.94,37.21 22.73,37.21 21.65,38.29 21.65,45.09 22.29,45.72 27.56,45.72 28,46.16 v28,46.99 | v20.26,28.83 v22.35,30.86

## Text on the board
tPlace: Made in Finland | by AOD electronics | Hw. rev. 3.0 | 5V | 5V | 5V | A5 | A4 | A3 | A2 | A1 | A0 | 3.3V | 3.3V | GND | GND | RST | INT | AI | B5 | B4 | B3 | B2 | B1 | 0 | 1 | 2 | ~3 | 4 | ~5 | ~6 | 7 | 8 | ~9 | ~10 | ~11 | 12 | 13 | RST
tNames: 3.3V I/O | MISO | VTG | SCK | MOSI | RST | GND